# Altium PCB EdisonDecaAnchor_Redesign.PcbDoc (part 2 of 2)
Units mm, origin at the board's own origin, x right, y up, seen from the top; angles counter-clockwise.
Board outline 53.5 x 37.5 mm, 6 copper layers (Top Layer, Ground, Mid-Layer 2, Mid-Layer 3, Power, Bottom Layer), stack 1.141 mm thick; 153 components, 128 nets, 528 pads, 277 vias.
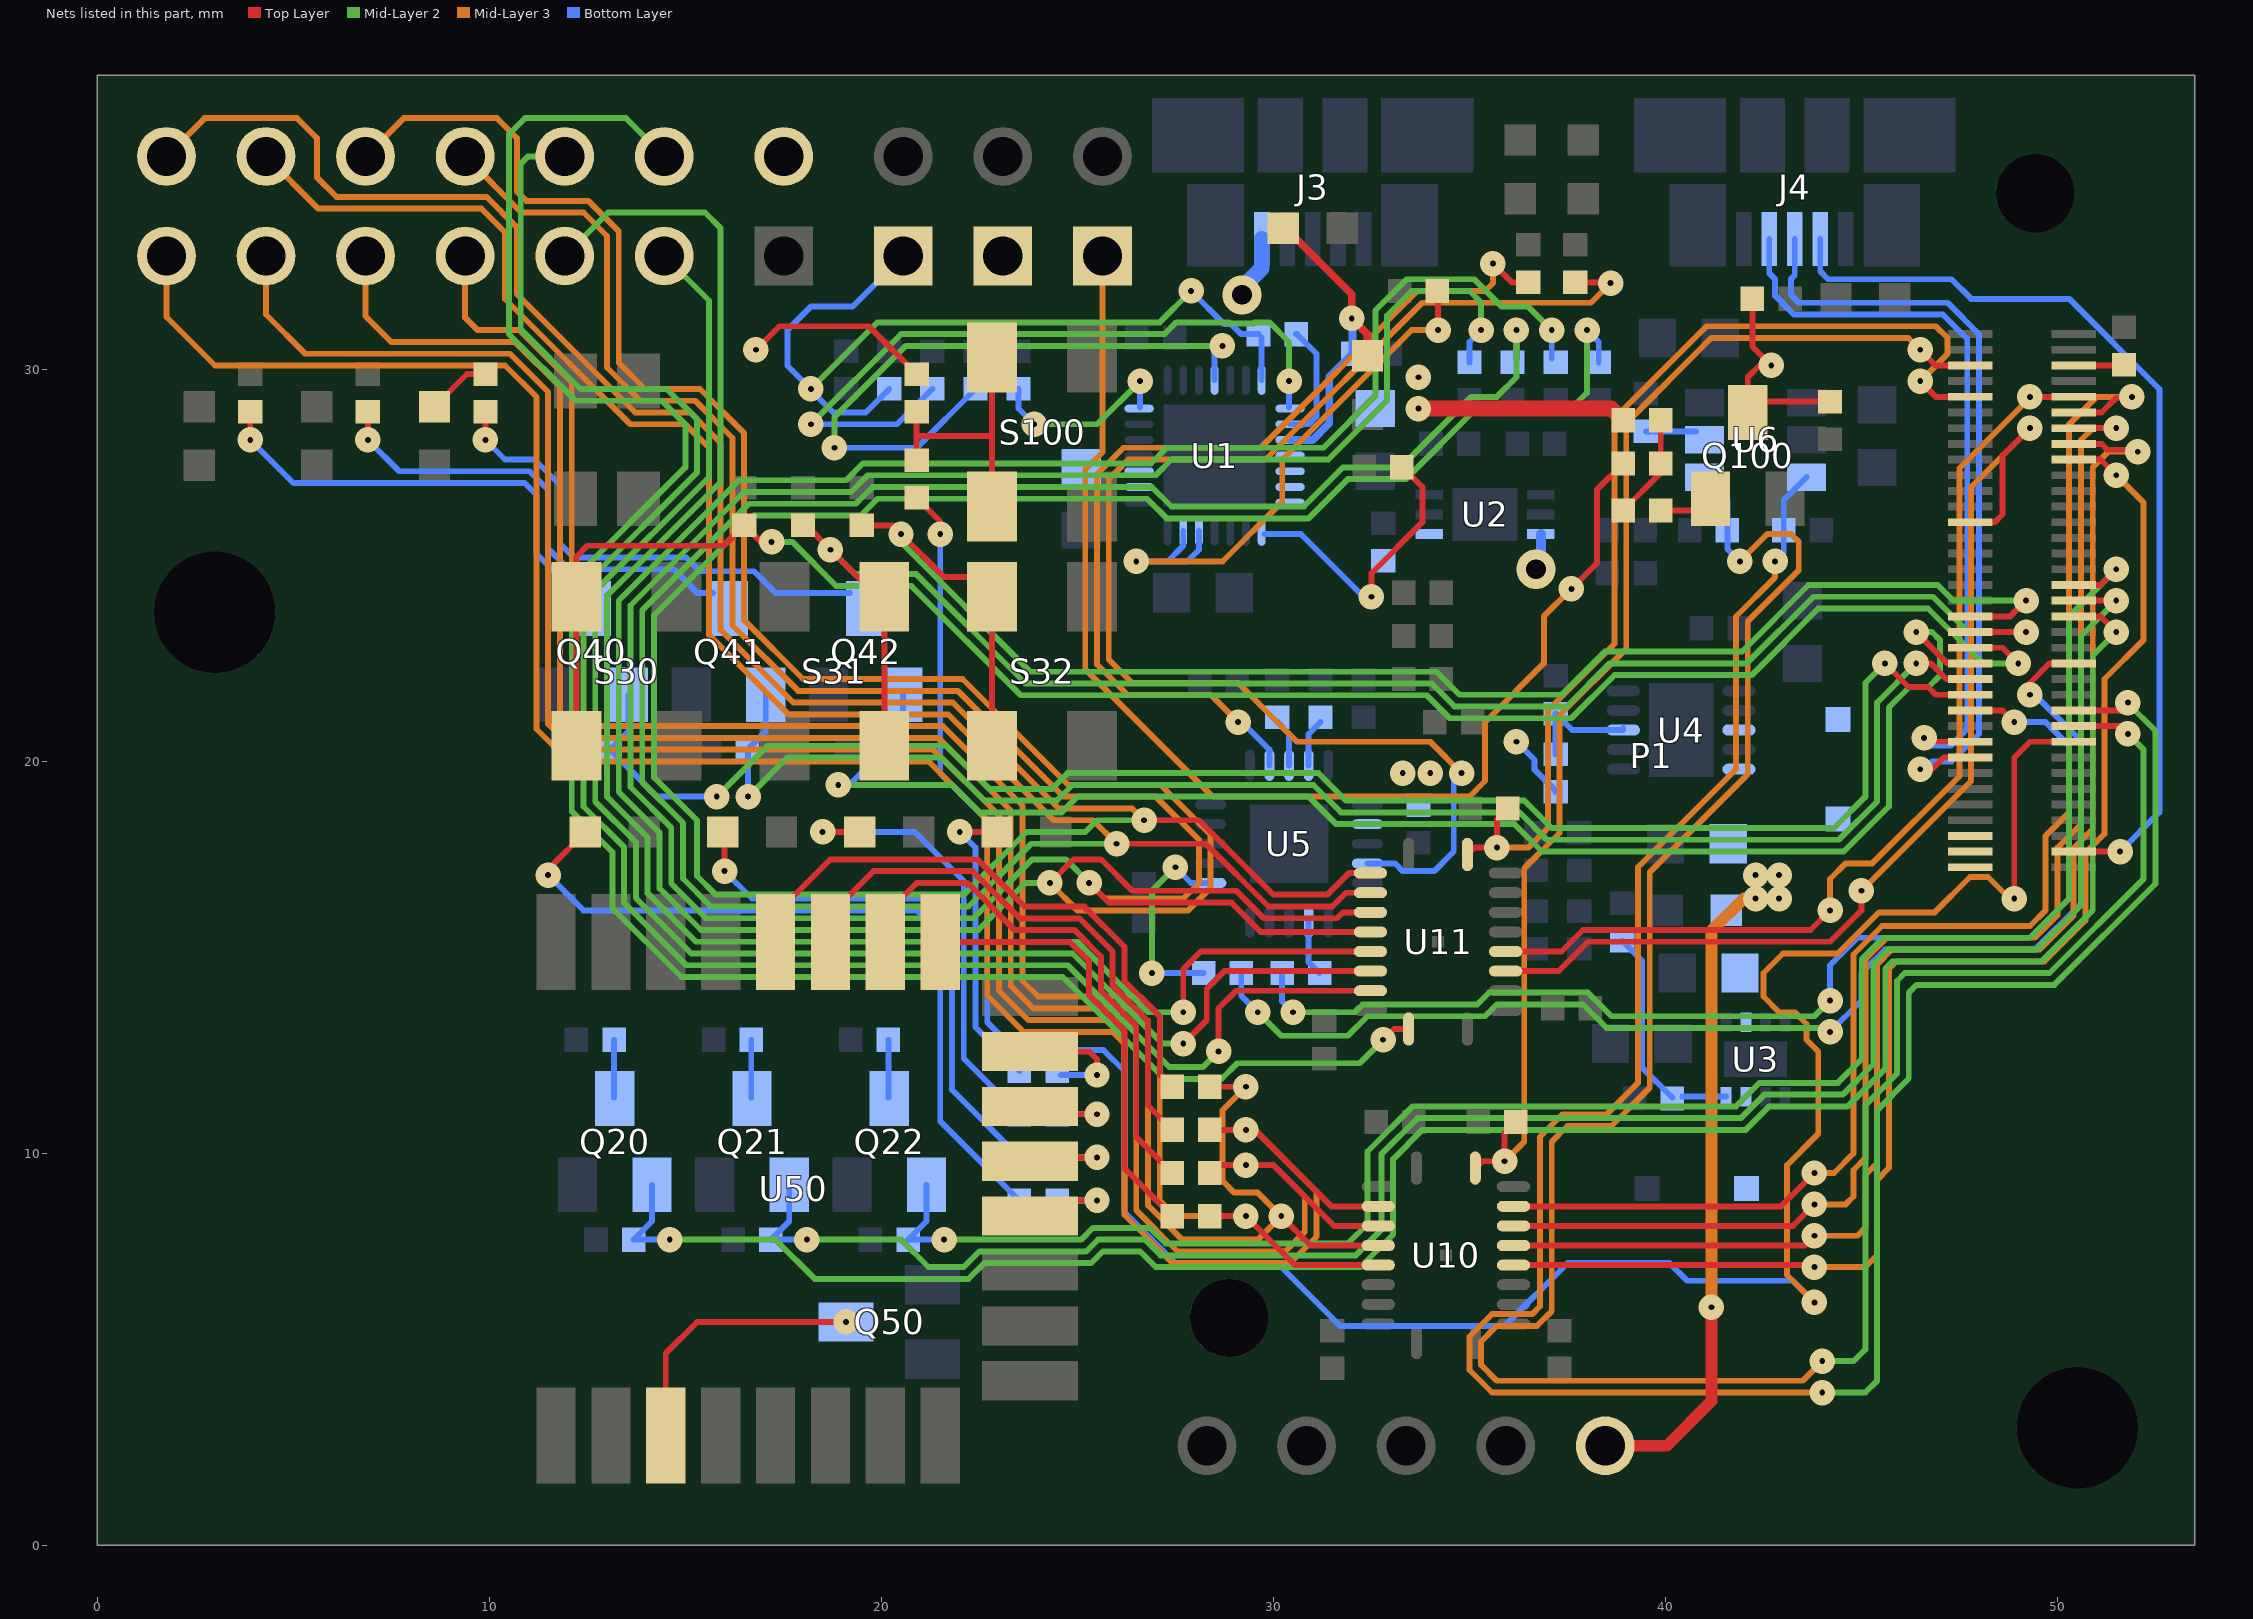
[diagram p6: the nets of this part, all layers, seen from the top]

## Via types
v1: diameter 0.65, hole 0.15, Top Layer to Bottom Layer, 274 vias
v2: diameter 1, hole 0.5, Top Layer to Bottom Layer, 2 vias
v3: diameter 0.65, hole 0.15, Top Layer to Bottom Layer, tented bottom, 1 vias

## Nets (pads, with @x,y where several pads share a name; then routed paths per layer and width w, separated by ;. In a path a pad name is that pad's centre, name@x,y a point inside that pad or via, vN(x,y) a via of type N, cw(c..) or ccw(c..) an arc to the next point about the centre after c; other vN are vias at no path point) (continued)
NetD42_2: D42.2 R142.1 | length 1.6
  Top Layer w0.15: D42.2@8.6,29.05 9.43,29.88 R142.1@9.9,29.88
NetD50_1: D50.1 R150.2 | length 7.7
  Top Layer w0.15: v1(22,18.2) D50.1@22.95,18.2
  Bottom Layer w0.15: v1(22,18.2) 22.4,17.8 22.4,13.22 R150.2@23.52,12.1
NetD51_1: D51.1 R151.2 | length 11.6
  Top Layer w0.15: v1(18.5,18.2) D51.1@19.45,18.2
  Bottom Layer w0.15: v1(18.5,18.2) 20.849,18.2 22.1,16.949 22.1,12.42 R151.2@23.52,11
NetD52_1: D52.1 R152.2 | length 13.9
  Top Layer w0.15: v1(16,17.2) D52.1@16,18.15
  Bottom Layer w0.15: v1(16,17.2) 16.7,16.5 21.024,16.5 21.8,15.724 21.8,11.62 R152.2@23.52,9.9
NetD53_1: D53.1 R153.2 | length 19.9
  Top Layer w0.15: v1(11.5,17.1) 11.5,17.25 D53.1@12.45,18.2 D53.1@12.45,18.05
  Bottom Layer w0.15: v1(11.5,17.1) 12.4,16.2 20.9,16.2 21.5,15.6 21.5,10.82 R153.2@23.52,8.8
NetD100_1: D100.1 D101.1 R116.1 | length 2.7
  Top Layer w0.15: R116.1@38.92,26.4 39.88,27.36 D100.1@39.88,27.6 D101.1@39.88,28.7
NetJ2_1: J2.1 U2.6 | length 1
  Bottom Layer w0.25: v2(36.7,24.9) 36.825,25.025 U2.6@36.825,25.8
NetL1_1: L1.1 U3.7
NetL2_2: L2.2 U4.3
NetP1_24: P1.24 Q40.1 R143.1 | length 42.3
  Top Layer w0.15: v1(45.6,22.5) 46.2,21.9 46.7,21.9 46.9,21.7 P1.24@47.78,21.7
  Mid-Layer 2 w0.15: v1(15.8,19.1) 17.1,20.4 21.649,20.4 22.749,19.3 24.351,19.3 24.751,19.7 31.149,19.7 31.849,19 36.4,19 37.1,18.3 44.3,18.3 45.1,19.1 45.1,22 v1(45.6,22.5)
  Bottom Layer w0.15: Q40.1@13.55,21.7 13.55,20.77 R143.1@13.08,20.3 14.28,19.1 v1(15.8,19.1)
NetP1_26: P1.26 Q41.1 R144.1 | length 39.1
  Top Layer w0.15: v1(46.4,22.5) 46.768,22.5 47.168,22.1 P1.26@47.78,22.1
  Mid-Layer 2 w0.15: v1(16.6,19.1) 17.6,20.1 21.524,20.1 22.624,19 24.476,19 24.876,19.4 31.024,19.4 31.724,18.7 36.276,18.7 36.976,18 44.424,18 45.4,18.976 45.4,21.5 v1(46.4,22.5)
  Bottom Layer w0.15: R144.1@16.58,20.3 17.05,20.77 Q41.1@17.05,21.7 ; v1(16.6,19.1) R144.1@16.6,20.28
NetP1_28: P1.28 Q42.1 R145.1 | length 38.9
  Top Layer w0.15: v1(46.4,23.3) 46.4,23.292 47.192,22.5 P1.28@47.78,22.5
  Mid-Layer 2 w0.15: v1(18.9,19.4) 21.8,19.4 22.5,18.7 24.6,18.7 25,19.1 30.9,19.1 31.6,18.4 36.151,18.4 36.851,17.7 44.549,17.7 45.7,18.851 45.7,21.376 46.224,21.9 46.712,21.9 47,22.188 47,23.1 46.8,23.3 v1(46.4,23.3)
  Bottom Layer w0.15: v1(18.9,19.4) 19.18,19.4 R145.1@20.08,20.3 20.55,20.77 Q42.1@20.55,21.7
NetP1_30: P1.30 R130.2 S30.2 | length 47.1
  Top Layer w0.15: S30.2@12.225,20.4 S30.2@12.225,24.2 12.225,25.225 12.5,25.5 15.98,25.5 R130.2@16.5,26.02 16.92,25.6 v1(17.2,25.6) ; P1.30@47.78,22.9 48.6,22.9 v1(49,22.5)
  Mid-Layer 2 w0.15: v1(17.2,25.6) 17.722,25.6 18.846,24.476 20.764,24.476 23.551,21.688 33.912,21.688 34.5,21.1 37.6,21.1 38.7,22.2 42.2,22.2 43.9,23.9 46.7,23.9 48.1,22.5 v1(49,22.5)
NetP1_32: P1.32 R131.2 S31.2 | length 41.5
  Top Layer w0.15: R131.2@18.08,26.02 v1(18.7,25.4) S31.2@19.9,24.2 ; S31.2@20.075,20.4 S31.2@20.075,24.2 ; P1.32@47.78,23.3 v1(49.2,23.3)
  Mid-Layer 2 w0.15: v1(18.7,25.4) 19.324,24.776 20.888,24.776 23.676,21.988 34.036,21.988 34.624,21.4 37.476,21.4 38.576,22.5 42.076,22.5 43.776,24.2 46.824,24.2 47.724,23.3 v1(49.2,23.3)
NetP1_33: P1.33 Q20.1 R123.1 | length 54.7
  Top Layer w0.15: P1.33@50.42,23.7 51.1,23.7 v1(51.5,23.3)
  Mid-Layer 2 w0.15: v1(14.6,7.8) 17.3,7.8 18.3,6.8 22.224,6.8 22.624,7.2 25.349,7.2 25.649,7.5 26.6,7.5 27,7.1 32.224,7.1 33.054,7.929 33.054,9.854 33.8,10.6 42.049,10.6 42.649,11.2 44.649,11.2 45.607,12.159 45.607,14.707 45.8,14.9 49.6,14.9 50.9,16.2 50.9,22.7 v1(51.5,23.3)
  Bottom Layer w0.15: Q20.1@14.15,9.2 14.15,8.27 R123.1@13.68,7.8 v1(14.6,7.8)
NetP1_34: P1.34 R132.2 S32.2 | length 40.3
  Top Layer w0.15: R132.2@19.5,26.02 v1@20.28,26.02 ; v1(20.5,25.8) 21.6,24.7 S32.2@22.325,24.7 ; S32.2@22.825,20.4 S32.2@22.825,24.2 ; P1.34@47.78,23.7 48.8,23.7 v1(49.2,24.1)
  Mid-Layer 2 w0.15: v1(20.5,25.8) 20.5,25.588 23.8,22.288 34.161,22.288 34.749,21.7 37.351,21.7 38.451,22.8 41.951,22.8 43.651,24.5 46.949,24.5 47.349,24.1 v1(49.2,24.1)
NetP1_35: P1.35 Q21.1 R124.1 | length 51.3
  Top Layer w0.15: P1.35@50.42,24.1 v1(51.5,24.1)
  Mid-Layer 2 w0.15: v1(18.1,7.8) 20.5,7.8 21.2,7.1 22.1,7.1 22.5,7.5 25.224,7.5 25.524,7.8 26.724,7.8 27.124,7.4 32.1,7.4 32.754,8.054 32.754,9.978 33.676,10.9 41.924,10.9 42.524,11.5 44.524,11.5 45.307,12.283 45.307,14.831 45.676,15.2 49.476,15.2 50.6,16.324 50.6,23.2 v1(51.5,24.1)
  Bottom Layer w0.15: Q21.1@17.65,9.2 17.65,8.27 R124.1@17.18,7.8 v1(18.1,7.8)
NetP1_37: P1.37 Q22.1 R125.1 | length 47.9
  Top Layer w0.15: P1.37@50.42,24.5 51.1,24.5 v1(51.5,24.9)
  Mid-Layer 2 w0.15: v1(21.6,7.8) 25.1,7.8 25.4,8.1 26.849,8.1 27.249,7.7 31.9,7.7 32.4,8.2 32.4,10.049 33.551,11.2 41.8,11.2 42.4,11.8 44.4,11.8 45.007,12.407 45.007,14.956 45.551,15.5 49.3,15.5 50.3,16.5 50.3,23.7 v1(51.5,24.9)
  Bottom Layer w0.15: Q22.1@21.151,9.199 21.151,8.271 R125.1@20.68,7.8 v1(21.6,7.8)
NetP1_53: P1.53 U10.5 | length 35.9
  Top Layer w0.15: U10.5@36.125,7.15 43.75,7.15 v1(43.8,7.1) ; P1.53@50.42,27.7 51.098,27.7 51.498,27.3 v1(51.5,27.3)
  Mid-Layer 3 w0.15: v1(43.8,7.1) 45.1,7.1 45.4,7.4 45.4,9.327 45.7,9.627 45.7,14.703 45.897,14.9 49.673,14.9 50.712,15.939 50.712,17.664 51.2,18.151 51.2,22.1 52.2,23.1 52.2,26.6 v1(51.5,27.3)
NetP1_55: P1.55 U10.6 | length 36.2
  Top Layer w0.15: U10.6@36.125,7.65 43.55,7.65 v1(43.8,7.9) ; P1.55@50.42,28.1 51.122,28.1 51.272,27.95 52,27.95 v1(52.05,27.9)
  Mid-Layer 3 w0.15: v1(43.8,7.9) 44.9,7.9 45.1,8.1 45.1,9.451 45.4,9.751 45.4,14.827 45.773,15.2 49.549,15.2 50.412,16.064 50.412,17.788 50.9,18.276 50.9,27.5 51.3,27.9 v1(52.05,27.9)
NetP1_57: P1.57 U10.7 | length 35
  Top Layer w0.15: U10.7@36.125,8.15 43.25,8.15 v1(43.8,8.7) ; P1.57@50.42,28.5 v1(51.5,28.5)
  Mid-Layer 3 w0.15: v1(43.8,8.7) 44.6,8.7 44.8,8.9 44.8,9.576 45.1,9.876 45.1,14.951 45.649,15.5 49.424,15.5 50,16.076 50,17.8 50.6,18.4 50.6,28.2 50.9,28.5 v1(51.5,28.5)
NetP1_59: P1.59 U10.8 | length 35.9
  Top Layer w0.15: U10.8@36.125,8.65 42.95,8.65 v1(43.8,9.5) ; P1.59@50.42,28.9 51.122,28.9 51.5,29.278 51.878,29.278 v1(51.9,29.3)
  Mid-Layer 3 w0.15: v1(43.8,9.5) 44.3,9.5 44.8,10 44.8,15.076 45.524,15.8 49.3,15.8 49.7,16.2 49.7,18.1 50.3,18.7 50.3,28.6 51,29.3 v1(51.9,29.3)
NetP1_65: P1.65 R100.1 | length 1.3
  Top Layer w0.15: P1.65@50.42,30.1 R100.1@51.68,30.1
NetQ20_3: Q20.3 R120.1 | length 1.5
  Bottom Layer w0.15: Q20.3@13.18,11.42 R120.1@13.18,12.9
NetQ21_3: Q21.3 R121.1 | length 1.5
  Bottom Layer w0.15: Q21.3@16.68,11.42 R121.1@16.68,12.9
NetQ22_3: Q22.3 R122.1 | length 1.5
  Bottom Layer w0.15: Q22.3@20.18,11.421 R122.1@20.18,12.9
NetQ40_3: Q40.3 R140.2 | length 12.1
  Top Layer w0.15: v1(3.9,28.2) R140.2@3.9,28.92
  Bottom Layer w0.15: v1(3.9,28.2) 5,27.1 10.9,27.1 11.2,26.8 11.2,25.3 Q40.3@12.6,23.9
NetQ41_3: Q41.3 R141.2 | length 12
  Top Layer w0.15: v1(6.9,28.2) R141.2@6.9,28.92
  Bottom Layer w0.15: v1(6.9,28.2) 7.7,27.4 11.024,27.4 11.5,26.924 11.5,25.424 12.024,24.9 14.7,24.9 15.3,24.3 Q41.3@15.7,24.3
NetQ42_3: Q42.3 R142.2 | length 12.5
  Top Layer w0.15: v1(9.9,28.2) R142.2@9.9,28.92
  Bottom Layer w0.15: v1(9.9,28.2) 10.4,27.7 11.149,27.7 11.8,27.049 11.8,25.549 12.149,25.2 15.022,25.2 15.372,24.85 16.75,24.85 17.3,24.3 Q42.3@19.2,24.3
NetQ50_3: Q50.3 U50.3 | length 7
  Top Layer w0.15: U50.3@14.5,2.805 14.5,4.9 15.3,5.7 v1(19.1,5.7)
NetQ100_1: Q100.1 R116.2 | length 1
  Top Layer w0.15: R116.2@39.88,26.4 Q100.1@40.85,26.4
NetR1_1: R1.1 U1.7 | length 4.9
  Mid-Layer 2 w0.15: v1(23.9,28.6) 25.5,28.6 v1(26.6,29.7)
  Bottom Layer w0.15: R1.1@23.5,29.5 23.5,29 v1(23.9,28.6) ; U1.7@26.6,29.025 v1(26.6,29.7)
NetR2_1: R2.1 U1.11 | length 16.6
  Mid-Layer 2 w0.15: v1(18.8,28) 18.8,28.776 20.624,30.6 v1(28.7,30.6)
  Bottom Layer w0.15: v1(18.8,28) 20.9,28 R2.1@22.4,29.5 ; U1.11@28.5,29.725 28.5,30.4 v1(28.7,30.6)
NetR3_2: R3.2 U1.15 | length 18.7
  Mid-Layer 2 w0.15: v1(18.2,28.6) 20.5,30.9 27.224,30.9 27.524,31.2 28.875,31.2 28.9,31.175 29.5,31.175 29.525,31.2 29.9,31.2 30.4,30.7 v1(30.4,29.7)
  Bottom Layer w0.15: v1(18.2,28.6) 20.4,28.6 R3.2@21.3,29.5 ; U1.15@30.4,29.025 v1(30.4,29.7)
NetR4_1: R4.1 R5.1 R6.1 U1.14 | length 22
  Mid-Layer 2 w0.15: v1(18.2,29.5) 19.9,31.2 27.1,31.2 v1(27.9,32)
  Bottom Layer w0.15: R6.1@20.2,29.5 19.6,28.9 18.772,28.9 18.2,29.472 v1(18.2,29.5) 17.6,30.1 17.6,31 18.2,31.6 19.265,31.6 R5.1@20.558,32.893 ; v1(27.9,32) 28.75,31.15 28.928,31.15 29.178,30.9 R4.1@29.62,30.9 ; U1.14@29.7,29.725 R4.1@29.7,30.82
NetR4_2: R4.2 U1.16 | length 3.1
  Bottom Layer w0.15: U1.16@30.425,28.6 30.9,28.6 31.1,28.8 31.1,30.4 30.6,30.9 R4.2@30.58,30.9
NetR7_2: R7.2 U1.26 U1.27 | length 14.9
  Top Layer w0.15: v1(34.2,31) R7.2@34.2,31.98
  Mid-Layer 3 w0.15: v1(26.5,25.1) 28.7,25.1 30.224,26.624 30.224,27.7 33.524,31 v1(34.2,31)
  Bottom Layer w0.15: v1(26.5,25.1) 27.3,25.1 ; U1.27@27.7,25.875 27.7,25.5 27.3,25.1 ; U1.26@28.1,25.875 28.1,25.4 27.8,25.1 27.3,25.1
NetR8_1: R8.1 U1.22 | length 7.5
  Top Layer w0.15: v1(32.5,24.2) 32.5,24.8 33.8,26.1 33.8,27 33.3,27.5 R8.1@33.28,27.5
  Bottom Layer w0.15: U1.22@29.775,25.8 30.7,25.8 32.3,24.2 v1(32.5,24.2)
NetR30_2: R30.2 R31.1 U3.8 | length 5.7
  Bottom Layer w0.15: R30.2@38.9,15.42 39.4,14.92 39.4,12.2 R31.1@40.18,11.42 ; R31.1@40.43,11.45 U3.8@41.55,11.45
NetR40_1: R40.1 R41.2 U4.8 | length 3
  Bottom Layer w0.15: R40.1@37.2,20.18 R41.2@37.2,21.22 37.62,20.8 U4.8@38.925,20.8 U4.8@38.925,20.85
NetR50_2: R50.2 U5.9 | length 1.2
  Bottom Layer w0.15: U5.9@30.9,19.9 30.9,20.7 R50.2@31.2,21
NetR51_2: R51.2 U5.8 | length 1.2
  Bottom Layer w0.15: R51.2@30.1,21 30.4,20.7 U5.8@30.4,19.9
NetR52_2: R52.2 U5.17 | length 1.4
  Bottom Layer w0.15: U5.17@30.9,15.9 30.9,14.88 R52.2@31.18,14.6
NetR53_2: R53.2 U5.1 | length 5.3
  Mid-Layer 2 w0.15: v1(26.9,14.6) 26.9,16.7 v1(27.5,17.3)
  Bottom Layer w0.15: v1(26.9,14.6) R53.2@28.22,14.6 ; v1(27.5,17.3) 27.9,16.9 U5.1@28.4,16.9
NetR54_2: R54.2 U5.14 | length 35.2
  Top Layer w0.15: R54.2@37.7,32.22 38.58,32.22 v1(38.6,32.2)
  Mid-Layer 3 w0.15: v1(34.8,19.7) 34,20.5 30.6,20.5 29.1,22 26.4,22 25.8,22.6 25.8,27.2 26,27.4 26.3,27.7 29.8,27.7 33.8,31.7 38.1,31.7 v1(38.6,32.2)
  Bottom Layer w0.15: U5.14@32.4,17.4 33.1,17.4 33.3,17.2 34.1,17.2 34.6,17.7 34.6,19.5 v1(34.8,19.7)
NetR55_1: R55.1 U5.7 | length 24.3
  Top Layer w0.15: v1(35.6,32.7) 36.08,32.22 R55.1@36.5,32.22
  Mid-Layer 3 w0.15: v1(29.1,21) 28.4,21.7 26.276,21.7 25.5,22.476 25.5,27.324 25.788,27.612 26.176,28 29.676,28 33.676,32 35.4,32 35.6,32.2 v1(35.6,32.7)
  Bottom Layer w0.15: v1(29.1,21) 29.2,21 29.9,20.3 U5.7@29.9,19.9
NetR60_1: R60.1 U6.5 | length 1.3
  Bottom Layer w0.15: R60.1@39.5,28.42 U6.5@40.78,28.42
NetR106_1: R106.1 TP108.1 U10.16 | length 46.1
  Top Layer w0.15: R106.1@28.38,8.4 v1(29.3,8.4) 30.55,7.15 U10.16@32.675,7.15
  Mid-Layer 3 w0.15: TP108.1@9.382,32.893 9.382,31.318 9.7,31 10.773,31 12.1,29.673 12.1,21.2 12.4,20.9 21.573,20.9 23.6,18.873 23.6,14.4 24,14 26.6,14 27.1,13.5 27.1,8.8 27.5,8.4 v1(29.3,8.4)
NetR107_1: R107.1 TP109.1 U10.15 | length 53.5
  Top Layer w0.15: R107.1@28.38,11.7 v1(29.3,11.7) ; v1(30.2,8.4) 30.95,7.65 U10.15@32.675,7.65
  Mid-Layer 3 w0.15: TP109.1@6.842,32.893 6.842,31.358 7.5,30.7 10.649,30.7 11.8,29.549 11.8,21.076 12.276,20.6 21.449,20.6 23.3,18.749 23.3,14.276 23.876,13.7 26.476,13.7 26.8,13.376 26.8,8.676 27.676,7.8 29.6,7.8 v1(30.2,8.4) 29.6,9 29,9 28.7,9.3 28.7,11.1 v1(29.3,11.7)
NetR108_1: R108.1 TP110.1 U10.14 | length 55.8
  Top Layer w0.15: R108.1@28.58,9.7 v1(29.3,9.7) 30,9.7 31.55,8.15 U10.14@32.675,8.15
  Mid-Layer 3 w0.15: TP110.1@4.302,32.893 4.302,31.398 5.3,30.4 10.524,30.4 11.5,29.424 11.5,20.951 12.151,20.3 21.324,20.3 23,18.624 23,14.151 23.751,13.4 26.2,13.4 26.5,13.1 26.5,8.551 27.551,7.5 30.3,7.5 30.8,8 30.8,8.9 30,9.7 v1(29.3,9.7)
NetR109_1: R109.1 TP111.1 U10.13 | length 60
  Top Layer w0.15: R109.1@28.38,10.6 v1(29.3,10.6) 29.524,10.6 31.474,8.65 U10.13@32.675,8.65
  Mid-Layer 3 w0.15: TP111.1@1.762,32.893 1.762,31.338 3,30.1 10.4,30.1 11.2,29.3 11.2,20.827 12.027,20 21.2,20 22.7,18.5 22.7,14.027 23.627,13.1 25.9,13.1 26.2,12.8 26.2,8.427 27.427,7.2 30.424,7.2 31.1,7.876 31.1,9.024 29.524,10.6 v1(29.3,10.6)
NetR110_1: R110.1 TP104.1 U11.15 | length 90.1
  Top Layer w0.15: v1(25.3,16.9) 25.8,16.4 28.927,16.4 29.677,15.65 U11.15@32.475,15.65
  Mid-Layer 2 w0.15: v1(25.3,16.9) 24.7,17.5 23.849,17.5 22.349,16 15.524,16 14.638,16.886 14.638,18.308 13.6,19.346 13.6,23.979 16.494,26.873 19.224,26.873 19.651,27.3 27,27.3 27.4,27.7 31.4,27.7 32.9,29.2 32.9,31.376 33.524,32 35,32 35.3,31.7 v1(35.3,31)
  Mid-Layer 3 w0.15: TP104.1@9.382,35.433 10.815,34 12.4,34 13,33.4 13,30.046 13.846,29.2 15.249,29.2 16.2,28.249 16.2,23.476 17.876,21.8 21.946,21.8 24.646,19.1 27,19.1 28.1,18 28.1,16.9 27.7,16.5 25.7,16.5 v1(25.3,16.9)
  Bottom Layer w0.15: R110.1@35,30.18 35,30.7 v1(35.3,31)
NetR111_1: R111.1 TP105.1 U11.14 | length 98.6
  Top Layer w0.15: v1(24.3,16.9) 24.9,17.5 25.6,17.5 26.4,16.7 29.051,16.7 29.751,16 31.624,16 31.774,16.15 U11.14@32.475,16.15
  Mid-Layer 2 w0.15: v1(24.3,16.9) 23.673,16.9 22.473,15.7 15.4,15.7 14.338,16.762 14.338,18.183 13.3,19.221 13.3,24.103 16.37,27.173 19.1,27.173 19.527,27.6 26.876,27.6 27.276,28 31.276,28 32.6,29.324 32.6,31.5 33.4,32.3 35.124,32.3 35.824,31.6 36.5,31.6 v1(37.1,31)
  Mid-Layer 3 w0.15: TP105.1@6.842,35.433 7.817,36.408 10.192,36.408 10.7,35.9 10.7,34.539 10.939,34.3 12.524,34.3 13.3,33.524 13.3,30.17 13.97,29.5 15.373,29.5 16.5,28.373 16.5,23.6 18,22.1 22.07,22.1 24.77,19.4 27.124,19.4 28.4,18.124 28.4,16.776 27.824,16.2 25,16.2 v1(24.3,16.9)
  Bottom Layer w0.15: R111.1@37.1,30.28 v1(37.1,31)
NetR112_1: R112.1 TP106.1 U11.13 | length 86.4
  Top Layer w0.15: v1(26,17.9) 28.276,17.9 29.876,16.3 31.5,16.3 31.85,16.65 U11.13@32.475,16.65
  Mid-Layer 2 w0.15: v1(26,17.9) 23.824,17.9 22.224,16.3 15.649,16.3 14.938,17.011 14.938,18.432 13.9,19.47 13.9,23.854 16.618,26.573 19.349,26.573 19.532,26.756 19.776,27 26.9,27 27.4,26.5 30.776,26.5 31.776,27.5 33.249,27.5 35.049,29.3 35.7,29.3 36.2,29.8 v1(36.2,31)
  Mid-Layer 3 w0.15: TP106.1@4.302,35.433 5.635,34.1 9.8,34.1 10.4,33.5 10.4,31.797 13.597,28.6 15,28.6 15.6,28 15.6,23.227 17.627,21.2 21.697,21.2 24.397,18.5 25.4,18.5 v1(26,17.9)
  Bottom Layer w0.15: R112.1@36.2,30.28 v1(36.2,31)
NetR113_1: R113.1 TP107.1 U11.12 | length 92.5
  Top Layer w0.15: v1(26.7,18.5) 28.1,18.5 30,16.6 31.376,16.6 31.926,17.15 U11.12@32.475,17.15
  Mid-Layer 2 w0.15: v1(26.7,18.5) 25.5,18.5 25.2,18.2 23.7,18.2 22.1,16.6 15.773,16.6 15.294,17.079 15.294,18.5 14.2,19.594 14.2,23.73 16.743,26.273 19.473,26.273 19.9,26.7 26.776,26.7 27.276,26.2 30.9,26.2 31.9,27.2 33.374,27.2 35.174,29 37.6,29 38,29.4 v1(38,31)
  Mid-Layer 3 w0.15: TP107.1@1.762,35.433 2.737,36.408 5.092,36.408 5.6,35.9 5.6,34.9 6.1,34.4 9.924,34.4 10.7,33.624 10.7,31.921 13.721,28.9 15.124,28.9 15.9,28.124 15.9,23.351 17.751,21.5 21.821,21.5 24.521,18.8 26.4,18.8 v1(26.7,18.5)
  Bottom Layer w0.15: v1(38,31) 38.3,30.7 R113.1@38.3,30.18
NetR114_2: R114.2 R115.2 S100.1 | length 7
  Top Layer w0.15: R114.2@20.9,27.68 R115.2@20.9,28.92 ; 20.9,28.3 22.825,28.3 ; S100.1@22.825,26.4 22.825,28.3 ; S100.1@22.825,30.2 22.825,28.3
NetR150_1: R150.1 U50.15 | length 3.1
  Top Layer w0.15: U50.15@23.795,12.6 25.3,12.6 25.5,12.4 v1(25.5,12)
  Bottom Layer w0.15: R150.1@24.58,12 v1(25.5,12)
NetR151_1: R151.1 U50.14 | length 2.5
  Top Layer w0.15: U50.14@23.995,11 v1(25.5,11)
  Bottom Layer w0.15: R151.1@24.48,11 v1(25.5,11)
NetR152_1: R152.1 U50.13 | length 2.6
  Top Layer w0.15: U50.13@23.895,9.9 v1(25.5,9.9)
  Bottom Layer w0.15: R152.1@24.48,9.9 v1(25.5,9.9)
NetR153_1: R153.1 U50.12 | length 2.3
  Top Layer w0.15: U50.12@24.195,8.8 v1(25.5,8.8)
  Bottom Layer w0.15: R153.1@24.48,8.8 v1(25.5,8.8)
NetTP100_1: TP100.1 U11.20 | length 51.7
  Top Layer w0.15: v1(32.8,12.9) 33.075,13.175 U11.20@33.45,13.175
  Mid-Layer 2 w0.15: TP100.1@14.462,35.433 13.487,36.408 10.908,36.408 10.5,36 10.5,30.9 12.2,29.2 14.4,29.2 15,28.6 15,27.5 12.1,24.6 12.1,18.724 13.138,17.686 13.138,16.262 14.9,14.5 24.627,14.5 27.227,11.9 28.678,11.9 29.078,12.3 32.2,12.3 v1(32.8,12.9)
NetTP101_1: TP101.1 U11.18 | length 47.1
  Top Layer w0.15: v1(28.6,12.6) 28.6,13.7 29.05,14.15 U11.18@32.475,14.15
  Mid-Layer 2 w0.15: TP101.1@11.922,35.433 10.99,35.433 10.8,35.243 10.8,31.024 12.324,29.5 14.524,29.5 15.3,28.724 15.3,27.376 12.4,24.476 12.4,18.849 13.438,17.811 13.438,16.386 15.024,14.8 24.751,14.8 27.351,12.2 28.2,12.2 v1(28.6,12.6)
NetTP102_1: TP102.1 U11.17 | length 40
  Top Layer w0.15: v1(27.7,12.8) 28.3,13.4 28.3,14.2 28.75,14.65 U11.17@32.475,14.65
  Mid-Layer 2 w0.15: TP102.1@14.462,32.893 15.6,31.755 15.6,27.251 12.7,24.351 12.7,18.973 13.738,17.935 13.738,16.511 15.149,15.1 24.876,15.1 27.176,12.8 v1(27.7,12.8)
NetTP103_1: TP103.1 U11.16 | length 44.2
  Top Layer w0.15: v1(27.7,13.6) 27.7,14.7 28.15,15.15 U11.16@32.475,15.15
  Mid-Layer 2 w0.15: TP103.1@11.922,32.893 13.029,34 15.5,34 15.9,33.6 15.9,27.127 13,24.227 13,19.097 14.038,18.059 14.038,16.635 15.273,15.4 25,15.4 26.8,13.6 v1(27.7,13.6)
PWRBTN: P1.17 R114.1 | length 64.4
  Top Layer w0.15: R114.1@20.9,26.72 21.5,26.12 v1(21.5,25.8) ; v1(48.9,16.5) 48.9,20.1 49.3,20.5 P1.17@50.42,20.5
  Mid-Layer 3 w0.15: v1(43.8,6.2) 43.1,6.9 43.1,9.7 43.9,10.5 43.9,12.6 43.6,12.9 43.6,13.3 43.3,13.6 42.9,13.6 42.5,14 42.5,14.6 43,15.1 44.4,15.1 45.45,16.15 46.872,16.15 47.772,17.05 48.228,17.05 48.778,16.5 v1(48.9,16.5)
  Bottom Layer w0.15: v1(21.5,25.8) 21.5,19.7 22.7,18.5 22.7,13.344 23.409,12.635 23.913,12.635 23.924,12.624 24.076,12.624 24.087,12.635 25.665,12.635 26.2,12.1 26.2,8.5 27.6,7.1 30.2,7.1 31.7,5.6 35.9,5.6 37.5,7.2 40.105,7.2 40.555,6.75 43.25,6.75 v1(43.8,6.2)
SPI_DECA.CS: R106.2 U50.17 | length 11.4
  Top Layer w0.15: U50.17@21.5,15.395 24.805,15.395 25.3,14.9 25.3,14.027 26.2,13.127 26.2,9.62 R106.2@27.42,8.4
SPI_DECA.MISO: R109.2 U50.19 | length 14.4
  Top Layer w0.15: U50.19@18.7,15.395 18.7,16.1 19.8,17.2 22.324,17.2 23.529,15.995 25.054,15.995 25.9,15.149 25.9,14.276 26.8,13.376 26.8,11.22 R109.2@27.42,10.6
SPI_DECA.MOSI: R108.2 U50.18 | length 13.6
  Top Layer w0.15: U50.18@20.1,15.395 20.1,16.1 20.9,16.9 22.2,16.9 23.405,15.695 24.929,15.695 25.6,15.024 25.6,14.151 26.5,13.251 26.5,10.42 R108.2@27.42,9.5
SPI_DECA.SCK: R107.2 U50.20 | length 15.2
  Top Layer w0.15: U50.20@17.3,15.395 17.3,16.1 18.7,17.5 22.449,17.5 23.654,16.295 25.178,16.295 26.2,15.273 26.2,14.4 27.1,13.5 27.1,12.02 R107.2@27.42,11.7
TXB_OE_1: P1.62 R202.1 U11.10 | length 27
  Top Layer w0.15: U11.10@34.95,17.625 35.125,17.8 v1(35.7,17.8) 35.7,18.52 R202.1@35.98,18.8 ; v1(46.5,29.7) 46.9,29.3 P1.62@47.78,29.3
  Mid-Layer 3 w0.15: v1(35.7,17.8) 36.5,17.8 37,18.3 37,21.3 38.7,23 38.7,28.751 41.049,31.1 46.9,31.1 47.2,30.8 47.2,30.4 v1(46.5,29.7)
TXB_OE_2: P1.66 R201.1 U10.10 | length 32
  Top Layer w0.15: U10.10@35.15,9.625 35.325,9.8 v1(35.9,9.8) 35.9,10.52 R201.1@36.18,10.8 ; v1(46.5,30.5) 46.9,30.1 P1.66@47.78,30.1
  Mid-Layer 3 w0.15: v1(35.9,9.8) 36.4,10.3 36.4,17.276 37.3,18.176 37.3,21.176 39,22.876 39,28.627 41.173,30.8 46.2,30.8 v1(46.5,30.5)
UART1_RX: P1.61 U11.5 | length 25.4
  Top Layer w0.15: U11.5@35.925,15.15 37.35,15.15 37.9,15.7 43.7,15.7 v1(44.2,16.2) ; v1(49.3,29.3) P1.61@50.42,29.3
  Mid-Layer 3 w0.15: v1(44.2,16.2) 44.2,17 44.6,17.4 45.276,17.4 47.5,19.624 47.5,27.478 49.3,29.278 v1(49.3,29.3)
UART1_TX: P1.46 U11.4 | length 27.2
  Top Layer w0.15: U11.4@35.925,14.65 37.274,14.65 38.024,15.4 44.2,15.4 45,16.2 v1(45,16.7) ; P1.46@47.78,26.1 48.4,26.1 48.6,26.3 48.6,27.8 v1(49.3,28.5)
  Mid-Layer 3 w0.15: v1(45,16.7) 47.8,19.5 47.8,27 v1(49.3,28.5)
UART_2_RX: P1.22 R52.1 | length 29.9
  Top Layer w0.15: P1.22@47.78,21.3 48.6,21.3 v1(48.9,21)
  Mid-Layer 2 w0.15: v1(30.5,13.6) 32.076,13.6 32.276,13.8 35.2,13.8 35.5,14.1 38.024,14.1 38.624,13.5 43.8,13.5 v1(44.2,13.9)
  Bottom Layer w0.15: R52.1@30.22,14.6 30.22,13.88 v1(30.5,13.6) ; v1(44.2,13.9) 44.2,14.8 44.9,15.5 49.3,15.5 50.3,16.5 50.3,20.4 49.7,21 v1(48.9,21)
UART_2_TX: P1.27 R53.1 | length 32.4
  Top Layer w0.15: v1(49.3,21.7) 49.3,22 49.8,22.5 P1.27@50.42,22.5
  Mid-Layer 2 w0.15: v1(29.6,13.6) 30.2,13 31.9,13 32.4,13.5 35.4,13.5 35.7,13.8 37.9,13.8 38.5,13.2 44.1,13.2 v1(44.2,13.1)
  Bottom Layer w0.15: R53.1@29.18,14.6 29.18,14.02 v1(29.6,13.6) ; v1(44.2,13.1) 45,13.9 45,14.6 45.1,14.7 45.6,15.2 49.424,15.2 50.6,16.376 50.6,20.524 49.424,21.7 v1(49.3,21.7)
USB_DN: J4.2 P1.18 | length 19.4
  Top Layer w0.15: v1(46.6,20.6) 46.7,20.5 P1.18@47.78,20.5
  Bottom Layer w0.15: J4.2@42.65,33.325 42.65,32.45 42.8,32.3 42.8,31.876 43.276,31.4 47.076,31.4 47.7,30.776 47.7,20.824 47.276,20.4 46.8,20.4 v1(46.6,20.6)
USB_DP: J4.3 P1.16 | length 20.2
  Top Layer w0.15: v1(46.5,19.8) 46.8,19.8 47.1,20.1 P1.16@47.78,20.1
  Bottom Layer w0.15: J4.3@43.3,33.325 43.3,32.4 43.2,32.3 43.2,31.9 43.4,31.7 47.2,31.7 48,30.9 48,20.7 47.3,20 46.8,20 46.6,19.8 v1(46.5,19.8)
USB_FAULT: P1.19 R62.2 U6.4 | length 62.7
  Top Layer w0.15: P1.19@50.42,20.9 51.6,20.9 v1(51.8,20.7)
  Mid-Layer 2 w0.15: v1(44,4.7) 44.8,4.7 45.1,5 45.1,11.227 45.907,12.034 45.907,14.4 46.107,14.6 49.797,14.6 52.2,17.003 52.2,20.3 v1(51.8,20.7)
  Mid-Layer 3 w0.15: v1(41.9,25.1) 42.6,25.8 43.2,25.8 43.4,25.6 43.4,24.873 42.1,23.573 42.1,19.676 39.6,17.176 39.6,11.676 38.624,10.7 37.5,10.7 37.1,10.3 37.1,6.1 37.1,5.976 36.724,5.6 35.7,5.6 35.3,5.2 35.3,4.6 35.7,4.2 43.3,4.2 43.5,4.2 v1(44,4.7)
  Bottom Layer w0.15: U6.4@41,27.25 41.58,26.67 R62.2@41.58,25.9 41.58,25.42 v1(41.9,25.1)
USB_ID: J4.4 P1.3 | length 24.1
  Top Layer w0.15: P1.3@50.42,17.7 v1(51.6,17.7)
  Bottom Layer w0.15: J4.4@43.95,33.325 43.95,32.5 44.15,32.3 47.3,32.3 47.8,31.8 50.3,31.8 52.6,29.5 52.6,18.7 v1(51.6,17.7)
USB_PSW: P1.21 R61.1 U6.3 | length 62.4
  Top Layer w0.15: P1.21@50.42,21.3 51.6,21.3 v1(51.8,21.5)
  Mid-Layer 2 w0.15: v1(44,3.9) 45.1,3.9 45.4,4.2 45.4,11.103 46.207,11.91 46.207,14.1 46.407,14.3 49.921,14.3 52.5,16.879 52.5,20.778 v1@51.8,21.478
  Mid-Layer 3 w0.15: v1(42.8,25.1) 42.8,24.697 41.8,23.697 41.8,19.8 39.3,17.3 39.3,11.8 38.5,11 37.376,11 36.8,10.424 36.8,6.1 36.6,5.9 35.576,5.9 35,5.324 35,4.476 35.576,3.9 v1(44,3.9) ; v1@51.8,21.478 v1(51.8,21.5)
  Bottom Layer w0.15: v1(42.8,25.1) 43.02,25.32 R61.1@43.02,25.9 43.02,26.67 U6.3@43.6,27.25
V_BATT: C6.2 U1.20 U1.21 U2.1
V_CHG_USB: C5.2 C50.2 D101.2 J3.1 U1.18 U1.19 U5.12 | length 7
  Top Layer w0.4: v1(33.7,29) 38.62,29 D101.2@38.92,28.7
  Bottom Layer w0.4: v2(29.2,31.9) 29.2,32.08 29.7,32.58 J3.1@29.7,33.325
  other v1: 33.3,19.7 34,19.7 33.7,29.8
V_DCIN: C1.2 D100.2 J1.1 U1.2 U1.3 | length 32
  Top Layer w0.15: v3(37.6,24.4) 38.25,25.05 38.25,26.93 D100.2@38.92,27.6
  Mid-Layer 3 w0.15: J1.1@25.638,32.893 25.638,27.887 25.2,27.449 25.2,22.351 28.451,19.1 35,19.1 35.4,19.5 35.4,21 36.9,22.5 36.9,23.7 v3(37.6,24.4)
V_LDO: C4.2 D1.1 D2.1 U1.17 | length 8.3
  Top Layer w0.2: D1.1@30.25,33.6 30.313,33.6 32,31.913 v1(32,31.3) 32.4,30.9 D2.1@32.4,30.35
  Bottom Layer w0.2: U1.17@30.425,28.2 31,28.2 31.425,28.625 31.425,29.805 C4.2@32.02,30.4 32.02,31.28 v1(32,31.3)
VSYS: C7.2 C9.2 D4.1 JP1.2 L2.1 P1.2 P1.4 P1.6 Q100.3 R9.1 R40.2 R115.1 R117.2 TP1.1 U3.2 U4.5 | length 28.8
  Top Layer w0.15: v1(16.8,30.5) 17.4,31.1 19.68,31.1 R115.1@20.9,29.88 ; Q100.3@42.1,28.9 42.1,29.8 42.4,30.1 v1(42.7,30.1) 42.22,30.58 R9.1@42.22,31.8 ; Q100.3@42.12,29.18 R117.2@44.2,29.18
  Top Layer w0.3: TP1.1@38.465,2.54 40.04,2.54 41.175,3.675 v1(41.175,6.075)
  Mid-Layer 3 w0.3: v1(41.175,6.075) 41.175,15.675 42,16.5 v1(42.3,16.5)
  Bottom Layer w0.15: v1(36.2,20.5) 36.665,20.035 36.665,19.787 37.2,19.252 R40.2@37.2,19.22
  other v1: 42.9,16.5 42.3,17.1 42.9,17.1
pads on no net: J3.4 P1.0 P1.7 P1.8 P1.10 P1.23 P1.25 P1.29 P1.31 P1.36 P1.38 P1.39 P1.40 P1.49 P1.51 P1.58 P1.60 P1.63 P1.67 P1.69 U1.25 U1.28 U2.7 U5.2 U5.4 U5.5 U5.6 U5.10 U5.15 U5.16 U5.18 U5.19 U50.4 U50.9 U50.10 U50.11
copper on no net:
  other v1: 34.925,26.3 35.875,26.3

## Polygon pours and split planes (outlines as drawn)
GND on Bottom Layer "GND_L06_P022" (solid, pour order 22): 39.2,29.1 40.4,29.1 40.4,32.7 39.2,32.7
GND on Bottom Layer "GND_L06_P020" (solid, pour order 20): 19.4,36.4 19.4,34.4 26.7,34.4 27.7,33.4 27.7,32.6 32.1,32.6 47.6,32.6 47.7,32.7 47.7,36.4
GND on Bottom Layer "GND_L06_P058" (solid, pour order 58): 11.7,10 20.1,10 20.1,6.5 11.7,6.5
GND on Bottom Layer "GND_L06_P056" (solid, pour order 56): 17.7,23.3 17.7,22.6 17.7,22.5 18.1,22.1 18.1,20 19.4,20 19.5,20 19.5,23.3
3V3 on Bottom Layer "3V3_L06_P000" (solid, pour order 0): 36.5,28.4 36.5,27.3 34.7,27.3 34.7,28.4
V_CHG_USB on Bottom Layer "V_CHG_USB_L06_P002" (solid, pour order 2): 30,27.9 30,27.3 31.3,27.3 32.6,28.6 33.9,28.6 34.1,28.8 34.1,30.2 33.6,30.2 33,29.6 32,29.6 31.7,29.6 31.7,28.6 31,27.9
V_BATT on Bottom Layer "V_BATT_L06_P004" (solid, pour order 4): 30,27.1 30,26.5 30.8,26.5 32.2,25.1 32.5,24.8 33.2,24.8 33.5,24.8 34.3,25.6 34.3,25.9 33.7,25.9 33.25,25.6 32.5,25.6 32.2,25.9 31,27.1
GND on Bottom Layer "GND_L06_P008" (solid, pour order 8): 32.5,25.9 32.1,26.3 32.1,27.9 33.2,27.9 33.2,26.8 33.5,26.5 33.7,26.5 34.3,26.5 34.3,26.1 33.5,26.1 33.2,25.8 32.6,25.8
NetC3_2 on Bottom Layer "NETC3_2_L06_P010" (solid, pour order 10): 28.8,26.3 29.4,26.3 29.4,25.5 30.1,24.8 30.1,23 28,23 28,23.6 28.5,24.1 28.5,25.2 28.8,25.5 28.8,26.3
V_DCIN on Bottom Layer "V_DCIN_L06_P012" (solid, pour order 12): 24.8,33.7 26.5,33.7 26.5,32.1 26.5,31.7 25.5,30.7 25.5,28.5 25.5,28.3 25.5,28.2 26.2,27.5 27,27.5 27,26.9 24.6,26.9 24.5,27 24.5,33.7
GND on Bottom Layer "GND_L06_P014" (solid, pour order 14): 24.6,26.4 25.6,26.4 25.6,25.3 26.3,24.6 27.8,24.6 27.8,23 28.4,22.4 28.4,21.7 27.8,21.7 24.6,24.9
NetC60_2 on Bottom Layer "NETC60_2_L06_P016" (solid, pour order 16): 41.8,34 42.2,34 42.2,28.8 40.5,28.8 40.5,29.8 40.9,30.2 40.9,31.6 41.8,32.5
5V on Bottom Layer "5V_L06_P024" (solid, pour order 24): 44.8,30.3 46,30.3 46,28.7 43.1,28.7 43.1,29.5 44.8,29.5
GND on Bottom Layer "GND_L06_P026" (solid, pour order 26): 43.1,28.4 46,28.4 46,26.9 45.3,26.2 44.7,25.6 44.7,23.9 43,23.9 43,24.6 43.7,25.6 43.7,26.2 43.7,27.7 43.1,27.7
1V8 on Bottom Layer "1V8_L06_P028" (solid, pour order 28): 29.5,16.3 29.5,15.2 26.4,15.2 26.4,16.3
V_CHG_USB on Bottom Layer "V_CHG_USB_L06_P032" (solid, pour order 32): 32.9,20.3 34.4,20.3 34.4,18.7 34,18.3 32,18.3 32,18.5 32.8,18.5 32.9,18.6
3V3 on Bottom Layer "3V3_L06_P034" (solid, pour order 34): 36.4,13.3 39.1,13.3 39.1,12.3 39.1,12.1 39.6,11.6 39.6,11.1 39.9,10.8 40.292,10.408 40.292,9.989 40.292,7.576 40.216,7.5 38.9,7.5 38.8,7.6 38.8,9.8 38.8,11.6 38.2,12.2 38,12.2 37.3,11.5 32.2,11.5 32.2,12.4 34.997,12.4
NetL1_1 on Bottom Layer "NETL1_1_L06_P036" (solid, pour order 36): 41.9,11.7 42.2,11.7 42.2,11 42.5,10.7 42.5,7.6 42.4,7.5 41.384,7.5 41.308,7.576 41.308,10.624 41.308,10.692 41.9,11 41.9,11.3
GND on Bottom Layer "GND_L06_P038" (solid, pour order 38): 39.7,15.1 40.9,15.1 40.9,14.2 41.4,13.7 41.7,13.7 41.7,13.1 41.7,11.9 40.1,11.9 39.7,12.3
VSYS on Bottom Layer "VSYS_L06_P040" (solid, pour order 40): 41.9,13.25 42.2,13.25 42.2,13.95 42.4,14.15 42.4,15.1 43.5,16.2 43.5,17.5 42.4,17.5 42.2,17.7 42.2,17.9 42.4,18.1 46,18.1 46,19.4 42.9,19.4 42.3,20 41.4,20 41.4,19.5 41.1,18.75 41.1,15.95 41.1,15.4 41.4,15.1 41.4,14.25 41.5,14.15 41.7,14.15 41.9,13.95
GND on Bottom Layer "GND_L06_P042" (solid, pour order 42): 37.5,15.9 38.3,15.9 38.3,16.7 38.9,17.3 40.5,17.3 40.9,17.7 40.9,19.7 39.6,19.7 39.6,18.8 38.3,17.5 37.5,17.5
NetL2_2 on Bottom Layer "NETL2_2_L06_P044" (solid, pour order 44): 41.5,20.9 41.5,20.7 42.3,20.7 42.7,20.3 42.8,20.2 46,20.2 46.1,20.3 46.1,21.4 46,21.5 43.1,21.5 42.5,20.9
5V on Bottom Layer "5V_L06_P046" (solid, pour order 46): 41.5,21.4 41.5,21.2 42.5,21.2 43.2,21.9 44.6,21.9 44.8,21.9 44.8,23.7 44.2,23.7 43.6,23.1 43,23.1 42.6,22.7 42.6,21.7 42.3,21.4
GND on Top Layer "GND_L01_P066" (solid, pour order 66): 25,14.5 25,13.5 22.6,13.5 21,11.9 15.1,11.9 15.1,15.3 16.5,15.3 16.5,14.2 16.7,14 16.8,14 21.6,14 22.1,14.5
3V3 on Top Layer "3V3_L01_P064" (solid, pour order 64): 30,1.6 32,1.6 32,2.7 33.1,3.8 33.1,5.8 31.2,5.8 30,4.6 30,4.5
3V3 on Top Layer "3V3_L01_P060" (solid, pour order 60): 16.8,1.6 16.8,5 20.6,5 20.6,1.6
GND on Top Layer "GND_L01_P054" (solid, pour order 54): 24.7,31.2 26,31.2 26,23.9 27.8,23.9 27.8,19.5 26,19.5 24.7,19.5
GND on Top Layer "GND_L01_P052" (solid, pour order 52): 18.2,25.1 19.1,24.2 19.1,19.2 16.5,16.6 16.5,14 11.1,14 11.1,16.2 13.9,19 13.9,25.1
VSYS on Top Layer "VSYS_L01_P048" (solid, pour order 48): 48.4,18.2 48.4,17.2 44.5,17.2 43.4,16.1 41.9,16.1 41.9,17.5 42.6,18.2 43,18.2
GND on Top Layer "GND_L01_P050" (solid, pour order 50): 51.1,20.2 51.1,17.1 49.1,17.1 49.1,20.2
GND on Ground (split plane): 52.398,14.7 45.7,14.7 45.7,1.102 11.1,1.102 11.1,27 1.102,27 1.102,36.398 52.398,36.398
5V on Power (split plane): 46.498,21.802 43.902,21.802 43.902,31.098 46.498,31.098
NetJ2_1 on Power (split plane): 24.298,31.6 24.302,31.581 24.305,31.562 24.306,31.562 24.306,31.561 24.317,31.545 24.327,31.529 24.328,31.528 24.344,31.517 24.36,31.506 37.598,25.833 37.598,23.902 31.813,23.902 21.902,30.057 21.902,33.998 24.298,33.998
1V8 on Power (split plane): 52.5,14.605 45.831,14.605 45.831,1 32.202,1 32.202,3.146 38.858,7.716 38.864,7.723 38.872,7.728 38.878,7.737 38.885,7.744 38.889,7.753 38.894,7.761 38.896,7.771 38.9,7.781 38.9,7.791 38.902,7.8 38.902,9.8 38.902,13.3 38.894,13.339 38.872,13.372 38.839,13.394 38.8,13.402 37,13.402 36.961,13.394 36.928,13.372 36.058,12.502 16.002,12.502 16.002,12.8 16.002,16 16.002,23.2 16.002,29.698 18.163,29.698 26.834,22.422 26.848,22.414 26.861,22.406 26.865,22.405 26.869,22.403 26.885,22.401 26.9,22.398 32.598,22.398 32.598,20.8 32.598,18.8 32.606,18.761 32.628,18.728 32.661,18.706 32.7,18.698 34.998,18.698 34.998,15.4 34.998,15.3 35.006,15.261 35.028,15.228 35.061,15.206 35.1,15.198 43.8,15.198 43.839,15.206 43.872,15.228 43.894,15.261 43.902,15.3 43.902,21.4 43.902,21.598 46.6,21.598 46.639,21.606 46.672,21.628 46.694,21.661 46.702,21.7 46.702,31.2 46.694,31.239 46.672,31.272 46.639,31.294 46.6,31.302 43.902,31.302 43.902,36.5 52.5,36.5
V_CHG_USB on Power (split plane): 41.298,31.058 41.298,21.802 36.2,21.802 36.161,21.794 36.128,21.772 35.028,20.672 35.006,20.639 34.998,20.6 34.998,18.902 32.802,18.902 32.802,20.8 32.802,22.5 32.794,22.539 32.772,22.572 32.739,22.594 32.7,22.602 31.902,22.602 31.902,23.3 31.902,23.698 37.7,23.698 37.739,23.706 37.772,23.728 37.794,23.761 37.802,23.8 37.802,25.9 37.798,25.919 37.795,25.938 37.794,25.938 37.794,25.939 37.783,25.955 37.773,25.971 37.772,25.972 37.756,25.983 37.74,25.994 24.502,31.667 24.502,33.998 38.358,33.998
VSYS on Power (split plane): 43.698,21.4 43.698,15.402 35.202,15.402 35.202,18.8 35.202,20.558 36.242,21.598 41.4,21.598 41.439,21.606 41.472,21.628 41.494,21.661 41.502,21.7 41.502,31.1 41.494,31.139 41.472,31.172 38.472,34.172 38.439,34.194 38.4,34.202 15.9,34.202 15.861,34.194 15.828,34.172 15.806,34.139 15.798,34.1 15.798,31.4 15.806,31.361 15.828,31.328 15.861,31.306 15.9,31.298 18.098,31.298 18.098,29.902 14.502,29.902 14.502,36.5 43.698,36.5
NetC3_2 on Power (split plane): 21.698,30 21.7,29.989 21.701,29.977 21.704,29.969 21.706,29.961 21.712,29.951 21.717,29.941 21.723,29.935 21.728,29.928 21.738,29.921 21.746,29.913 31.698,23.733 31.698,23.3 31.698,22.602 26.937,22.602 18.302,29.848 18.302,31.4 18.294,31.439 18.272,31.472 18.239,31.494 18.2,31.502 16.002,31.502 16.002,33.998 21.698,33.998
3V3 on Power (split plane): 14.298,29.8 14.306,29.761 14.328,29.728 14.361,29.706 14.4,29.698 15.798,29.698 15.798,23.2 15.798,16 15.798,12.8 15.798,12.4 15.806,12.361 15.828,12.328 15.861,12.306 15.9,12.298 36.1,12.298 36.139,12.306 36.172,12.328 37.042,13.198 38.698,13.198 38.698,9.8 38.698,7.854 32.042,3.284 32.036,3.277 32.028,3.272 32.022,3.263 32.015,3.256 32.011,3.247 32.006,3.239 32.004,3.229 32,3.219 32,3.209 31.998,3.2 31.998,1 11.1,1 11.1,27 1,27 1,36.5 14.298,36.5

## Other copper
Top Layer:
  rectangle: 34.1,25.6 36.7,27.3
Ground (plane layer: these items are gaps in the copper):
  rectangle: 45.7,0 53.5,14.7
  rectangle: 0,0 11.1,27
  rectangle: 0,26.5 1,37.5
  rectangle: 1,36.5 53.5,37.5
  rectangle: 52.5,13.5 53.5,37.5
  rectangle: 10.4,0 47,1
  lines w0.2: 1,1 1,36.5 52.5,36.5 52.5,1 1,1
Power (plane layer: these items are gaps in the copper):
  rectangle: 45.831,0 53.5,14.605
  rectangle: 0.051,0.076 11.1,27
  rectangle: 10.8,0 47,1
  rectangle: 52.5,14 53.5,37.5
  rectangle: 1,36.5 53.5,37.5
  rectangle: 0,26 1,37.5
  lines w0.2: 14.4,37.5 14.4,29.8 18.2,29.8 ; 15.9,29.8 15.9,23.2 15.9,16 15.9,12.8 15.9,12.4 16,12.4 ; 16.3,12.4 16,12.4 ; 31.8,22.5 31.8,23.3 31.8,23.78 31.8,23.8 32.7,23.8 33.4,23.8 35.7,23.8 37.7,23.8 37.7,25.9 24.4,31.6 24.4,34.1 ; 31.8,23.79 21.8,30 21.8,34.1 ; 32.1,0 32.1,3.2 38.8,7.8 38.8,9.8 38.8,13.3 37,13.3 36.1,12.4 32.6,12.4 21.6,12.4 16,12.4 ; 43.8,21.7 46.6,21.7 46.6,31.2 43.8,31.2 ; 43.8,37.5 43.8,21.4 43.8,15.3 35.4,15.3 35.1,15.3 35.1,15.4 35.1,18.8 ; 18.2,29.8 26.9,22.5 30.8,22.5 32.7,22.5 32.7,20.8 32.7,18.8 35.1,18.8 ; 18.2,29.8 18.2,31.4 15.9,31.4 15.9,34.1 21.8,34.1 ; 21.8,34.1 24.4,34.1 ; 24.4,34.1 38.4,34.1 41.4,31.1 41.4,21.7 40.3,21.7 36.2,21.7 35.1,20.6 35.1,18.8

## Silkscreen, mask and mechanical layers (free items; w line width, h text height)
Bottom Overlay:
  drawing of 845 lines, arcs and shapes, not listed
  text "06/2016 bunto1" at 2.633,8 h1 r270
  text "Rev 1.1" at 4.633,8 h1 r270
  text "EdisonDecaAnchor" at 6.633,8 h1 r270
Mechanical 1:
  the board outline again, w0.2
  text ".Pcb_File_Name_No_Path" at 1,-2.5 h1.52

## Text inside footprints (layer, text, board x,y; h text height)
P1: Mechanical 15 "1" at 50.775,15.95 h1.52 r90